# Altium PCB PCB1.PcbDoc
Units mm, origin at the board's own origin, x right, y up, seen from the top; angles counter-clockwise.
Board outline 100 x 50 mm, 2 copper layers (Top Layer, Bottom Layer), stack 1.571 mm thick; 14 components, 6 nets, 31 pads, 14 vias.
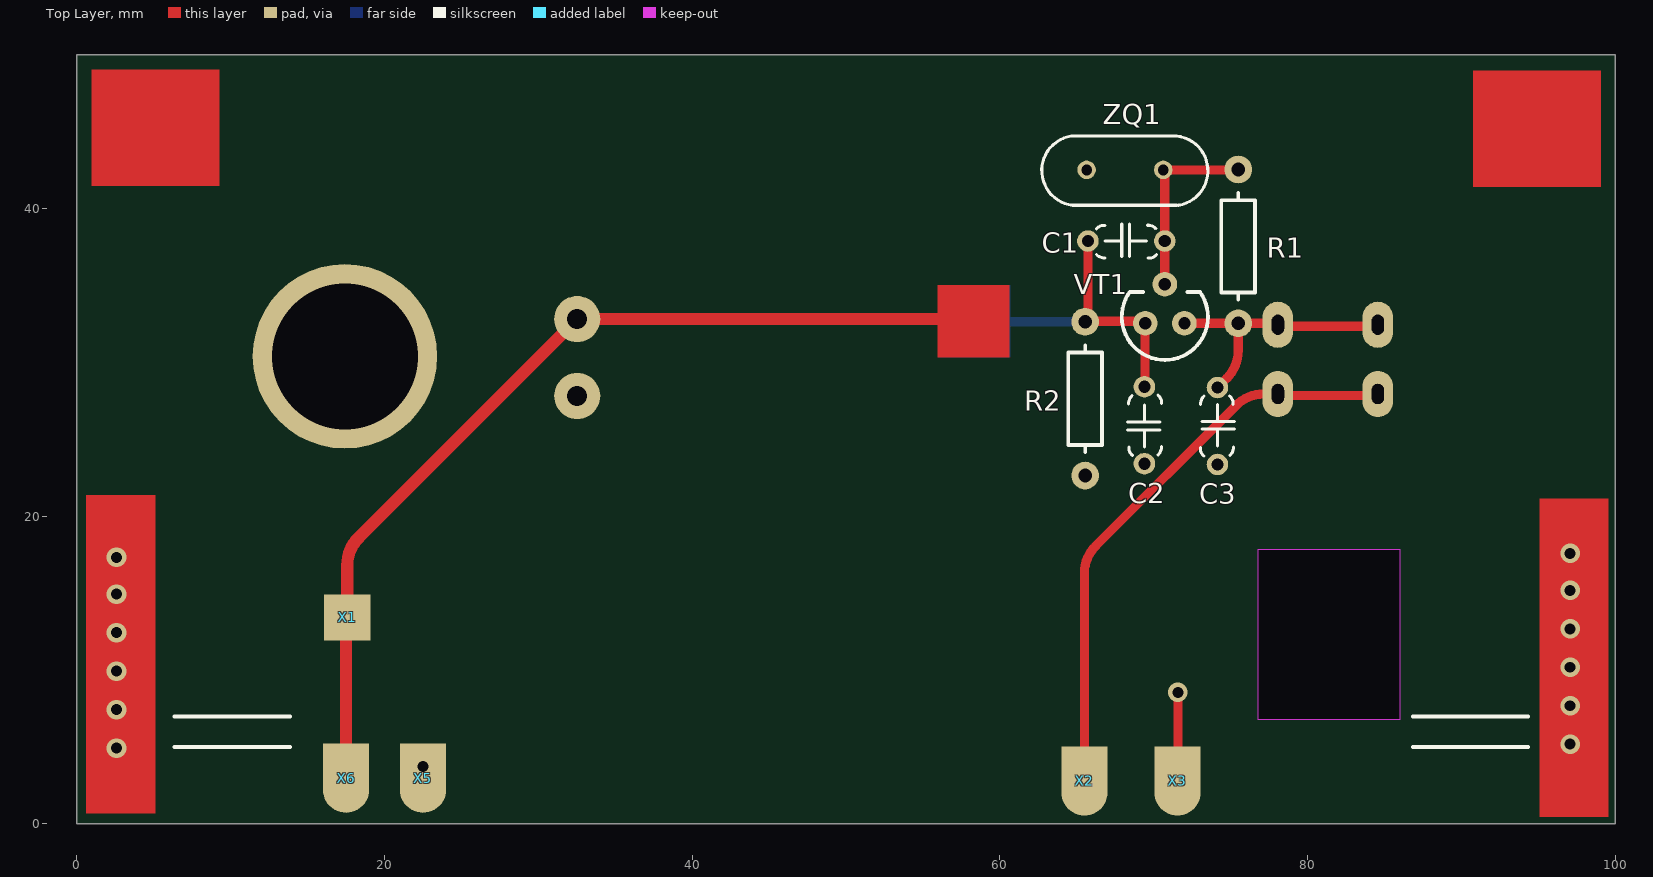
[diagram p0: Top Layer view]
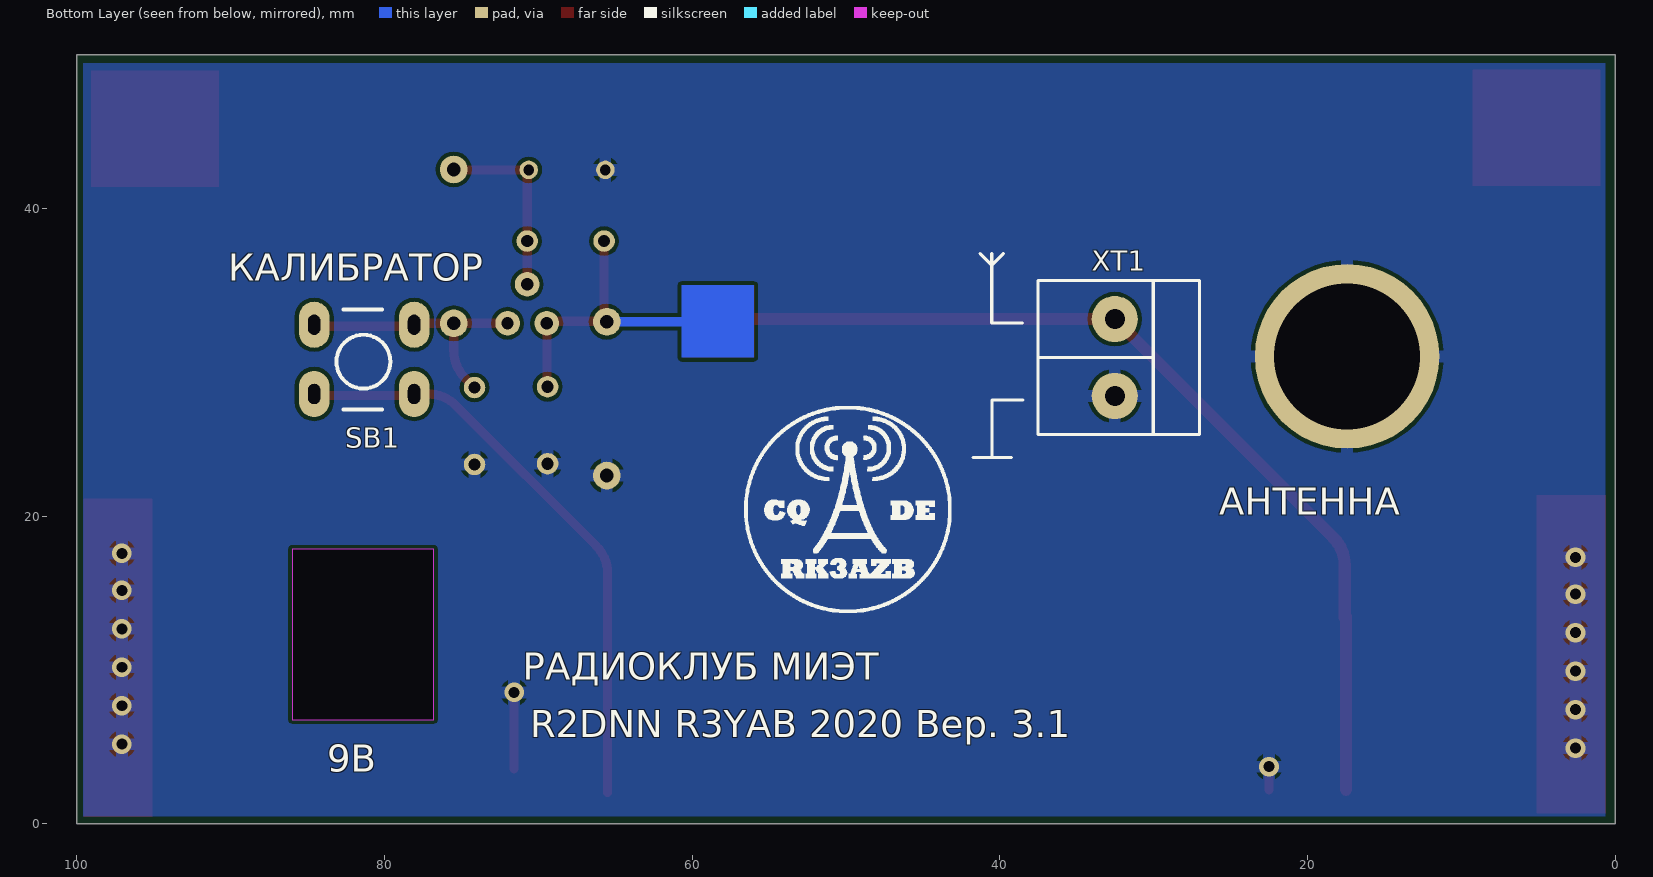
[diagram p1: Bottom Layer view, seen from below]
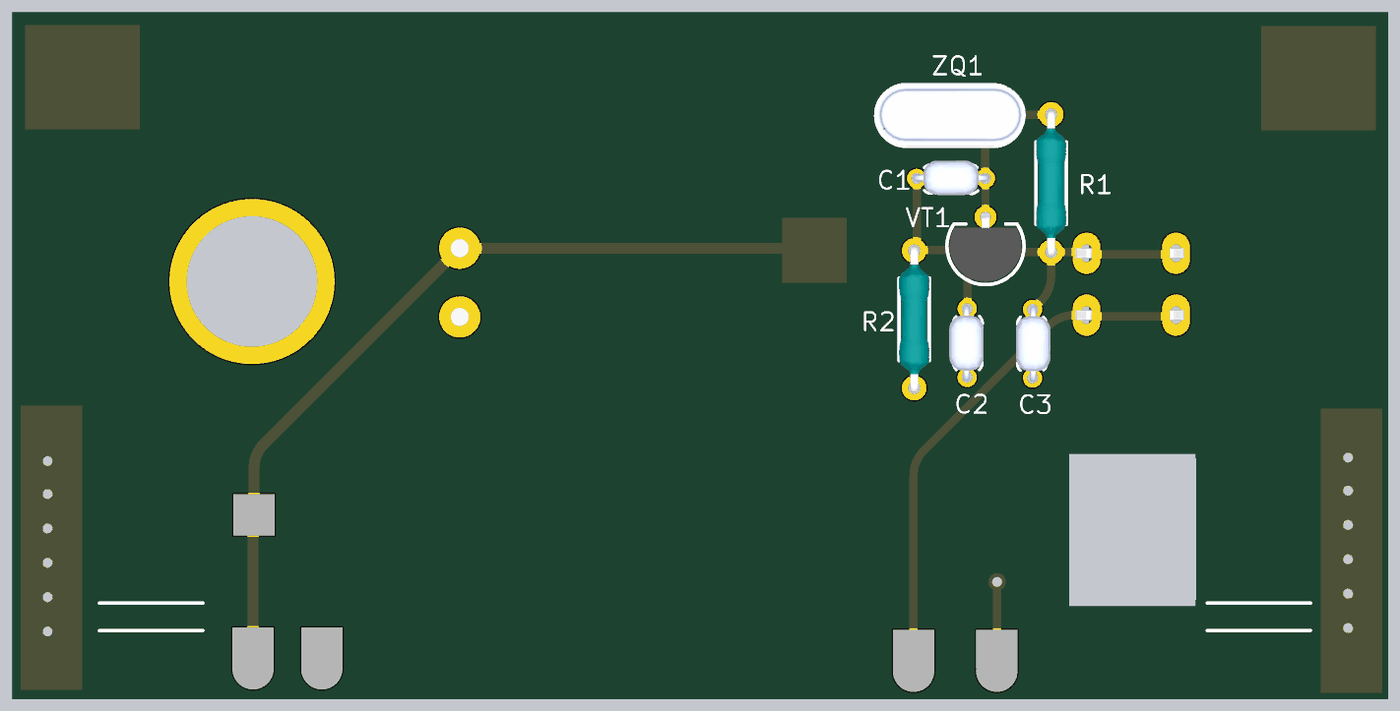
[diagram p2: 3D render of the assembled board from above, using the file's embedded part models]

## Layer stack, top to bottom
Top Solder: solder mask 0.0102, Solder Resist, Dk 3.5
Top Layer: signal copper 0.0356
Dielectric 1: dielectric 1.5, FR-4, Dk 4.8
Bottom Layer: signal copper 0.0356
Bottom Solder: solder mask 0.0102, Solder Resist, Dk 3.5

## Board outline
0,0 0,50 100,50 100,0
cut-out: 76.8,6.775 76.8,17.875 86,17.875 86,6.775

## Design rules (kind name [scope] priority, off if disabled: settings)
Clearance [All] p1: gap=0.254 ignorepadtopadclearanceinfootprint=FALSE except(0: Arc-Hole Track-Hole SMDPad-Hole THPad-Hole Via-Hole Fill-Hole Poly-Hole Region-Hole Text-Hole)
PolygonConnect [All] p1: connectstyle=Relief reliefconductorwidth=0.8 reliefentries=4 polygonreliefangle="90 Angle" airgapwidth=0.254
RoutingVias [All] p1: holewidth=0.711 width=1.27 viastyle="Through Hole" minholewidth=0.711 minwidth=1.27 maxholewidth=0.711 maxwidth=1.27
SolderMaskExpansion [All] p1: expansion=0.102 istentingtop=FALSE
Width [All] p1: maxlimit=1 minlimit=0.254 preferedwidth=0.254
30 further rules are at their usual default settings.

## Components (designator, comment, footprint, x,y, rotation, side; value= is the part's Value field where it differs from the comment)
C1 "150" К10-17Б 70.727,37.898 r180 top
C2 "150" К10-17Б 69.4,28.425 r270 top
C3 "0.1 мк" К10-17Б 74.15,23.375 r90 top (schematic designator C4)
R1 "15 к" С1-4 75.5,42.55 r270 top
R2 "1 к" С1-4 65.55,22.65 r90 top
SB1 "KLS7-TS6601" KLS7-TS6601 78.075,27.956 r0 bottom
VT1 "BC547" КТ-26 72,32.55 r180 top
X1 "SMT_Contact" SMT_CONTACT_TYPE_3 17.575,13.425 r180 top
X2 "SMT_Contact" SMT_CONTACT_TYPE_1 65.5,2.05 r180 top
X3 "SMT_Contact" SMT_CONTACT_TYPE_1 71.55,2.05 r180 top
X5 "SMT_Contact" SMT_CONTACT_TYPE_1 22.5,2.225 r180 top
X6 "SMT_Contact" SMT_CONTACT_TYPE_1 17.5,2.225 r180 top
XT1 "DG128-5.0-02P-14" DG128-5.0-02P-14 32.525,32.825 r270 bottom
ZQ1 "HC-49U" HC-49U 68.075,42.475 r180 top

## Footprints (in the part's own frame and the unit in brackets; to place one, negate y for a bottom-side part, rotate by r counter-clockwise, add the part's x,y. Pads: shape width x height; smd on the part's side, far side on the other; paste and mask are expansions set on the pad)
DG128-5.0-02P-14 [mm]
  round 3 hole 1.3: 1(0,0) 2(5,0)
  silkscreen extent -2.5,-5 7.5,5.5, body extent -2.5,-5 7.5,5.5, height 14
HC-49U [mm]
  round 1.2 hole 0.7: 1(-2.55,-0.05) 2(2.43,-0.05)
  silkscreen extent -5.45,-2.25 5.35,2.25, body extent -5.6,-2.3 5.4,2.2, height 13.2
KLS7-TS6601 [mm]
  oval 2x3 hole 0.8 slot 1.3 at 90 deg: 1(0,0) 1(6.5,0) 2(0,-4.5) 2(6.5,-4.5)
  silkscreen extent 1.55,-5.5 5.05,1, body extent -0.83,-5.25 7.14,0.75, height 5.4
SMT_CONTACT_TYPE_1 [mm]
  round 3 smd: 1(0,0)
  rect 3x3 smd: 1(0,-1.5)
SMT_CONTACT_TYPE_3 [mm]
  rect 3x3 smd: 1(0,0)
К10-17Б [mm]
  round 1.4 hole 0.8: 1(0,0) 2(5,0)
  silkscreen extent 0.55,-1.1 4.45,1.12, body extent -0.25,-1.3 5.25,1.2, height 6.54
КТ-26 [mm] "Аналог TO-92 // Масса не более 1г //  LIV"
  round 1.6 hole 0.8: 1(0,0) 2(1.27,-2.54) 3(2.54,0)
  silkscreen extent -1.53,-2.04 4.07,2.38, body extent -1.33,-2.81 3.87,2.16, height 7.7
С1-4 [mm] "С2-33(Н)-0,125; ОМЛТ-0,125; C2-10-0,125 // Масса 0,15 г // Трубка ТВ-40,2 белая высшего сорта ГОСТ 19034-82; UMI"
  round 1.8 hole 0.9: 1(0,0) 2(10,0)
  silkscreen extent 1.53,-1.1 8.46,1.1, body extent -0.3,-1.1 10.3,1.1, height 2.2

## Part data
C1 C2 C3: library part C_К10-17Б
R1 R2: library part R_C1-4

## Free pads (board coordinates)
  round 12 hole 9.5: 2(17.425,30.4)

## Via types
v1: diameter 1.27, hole 0.711, Top Layer to Bottom Layer, tented bottom, 12 vias
v2: diameter 1.27, hole 0.711, Top Layer to Bottom Layer, tented both sides, 2 vias

## Nets (pads, with @x,y where several pads share a name; then routed paths per layer and width w, separated by ;. In a path a pad name is that pad's centre, name@x,y a point inside that pad or via, vN(x,y) a via of type N, cw(c..) or ccw(c..) an arc to the next point about the centre after c; other vN are vias at no path point)
GND: C2.2 C3.1 pad.2 R2.1 X3.1 X5.1 XT1.2 ZQ1.2 | length 6.5
  Top Layer w0.254: X3.1@71.55,3.55 X3.1@71.575,3.575 ; v2@71.575,7.925 v2(71.575,8.55)
  Top Layer w0.6: X5.1@22.5,2.225 v2(22.5,3.725) ; X3.1@71.575,3.575 v2@71.575,7.925
  other v1: 2.575,4.939 97.075,5.189 2.575,7.439 97.075,7.689 2.575,9.939 97.075,10.189 2.575,12.439 97.075,12.689 2.575,14.939 97.075,15.189 2.575,17.339 97.075,17.589
NetC1_1: C1.1 R1.1 VT1.2 ZQ1.1 | length 12.5
  Top Layer w0.6: C1.1@70.687,37.862 C1.1@70.725,37.9 ; ZQ1.1@70.725,42.425 C1.1@70.725,37.9 ; ZQ1.1@70.725,42.525 R1.1@75.475,42.525 ; C1.1@70.727,38.123 C1.1@70.765,38.16 ; VT1.2 70.727,35.093 C1.1 C1.1@70.725,37.9 ; R1.1 R1.1@75.475,42.525 ; R1.1@75.725,42.525 R1.1@75.475,42.525
NetC1_2: C1.2 C2.1 R2.2 VT1.3 | length 18.5
  Top Layer w0.6: R2.2 R2.2@65.55,32.688 ; C1.2 65.727,32.865 R2.2@65.55,32.688 ; C2.1 69.43,28.455 69.43,32.52 VT1.3 69.323,32.688 R2.2@65.55,32.688
  Bottom Layer w0.6: 60.5,32.575 cw(c60.681,32.394) 60.681,32.65 R2.2
NetC4_2: C3.2 R1.2 SB1.2 VT1.1 | length 18
  Top Layer w0.6: VT1.1 R1.2 ; C3.2 74.756,28.981 ccw(c72.96,30.777) 75.5,30.777 R1.2 ; SB1.2@85.275,32.364 78.775,32.364 78.589,32.55 R1.2
NetSB1_1: SB1.1 X2.1 | length 39.9
  Top Layer w0.6: X2.1@65.5,2.05 65.5,3.55 65.5,16.298 cw(c68.04,16.298) 66.244,18.094 75.362,27.212 cw(c77.158,25.416) 76.382,27.834 cw(c77.158,25.416) 77.158,27.956 SB1.1@78.075,27.956 ; SB1.1@78,27.089 SB1.1@78.775,27.864 ; SB1.1@78.775,28.075 SB1.1@78.775,27.864 ; SB1.1@85.275,27.864 SB1.1@78.775,27.864
NetX1_1: X1.1 X6.1 XT1.1 | length 62.5
  Top Layer w0.8: X6.1@17.5,2.225 17.5,3.725 X1.1@17.5,13.5 ; X1.1 17.575,16.823 cw(c20.115,16.823) 18.319,18.619 XT1.1 58.179,32.825 cw(c58.179,32.654) 58.3,32.775

## Polygon pours and split planes (outlines as drawn)
GND on Bottom Layer "Top Layer-No Net" (solid, pour order 2): 99.575,49.45 99.575,0.5 0.625,0.5 0.625,49.45

## Other copper
Top Layer:
  rectangle net NetC1_2: 55.95,30.325 60.64,35.025
  region: 90.769,48.992 90.769,41.417 99.094,41.417 99.094,48.992
  region: 0.95,49.05 0.95,41.475 9.275,41.475 9.275,49.05
  rectangle net GND: 0.6,0.675 5.1,21.375
  rectangle net GND: 95.075,0.464 99.575,21.164
Bottom Layer:
  rectangle net NetC1_2: 55.991,30.325 60.681,35.025

## Silkscreen, mask and mechanical layers (free items; w line width, h text height)
Top Overlay:
  lines w0.254: 6.35,5 13.85,5 ; 6.35,7 13.85,7 ; 86.85,5 94.35,5 ; 86.85,7 94.35,7
Bottom Overlay:
  drawing of 2957 lines, arcs and shapes, not listed
  text "КАЛИБРАТОР" at 90.175,34.725 h3
  text "АНТЕННА" at 25.725,19.525 h3
  text "РАДИОКЛУБ МИЭТ" at 71.025,8.789 h3
  text "R2DNN R3YAB 2020 Вер. 3.1" at 70.525,5.039 h3
  text "9В" at 83.725,2.825 h3
Mechanical 13 (Mech13):
  lines w0.01: 76.8,6.775 76.8,17.875 86,17.875 86,6.775 76.8,6.775
  lines w0.15: 0,0 100,0 100,50 0,50 0,0
Mechanical 15:
  lines w0.15: 100,0.3 100.025,0.3